# Altium PCB PCB2.PcbDoc
Units mm, origin at the board's own origin, x right, y up, seen from the top; angles counter-clockwise.
Board outline 50.04 x 50.04 mm, 2 copper layers (Top Layer, Bottom Layer); 19 components, 27 nets, 88 pads, 0 vias.
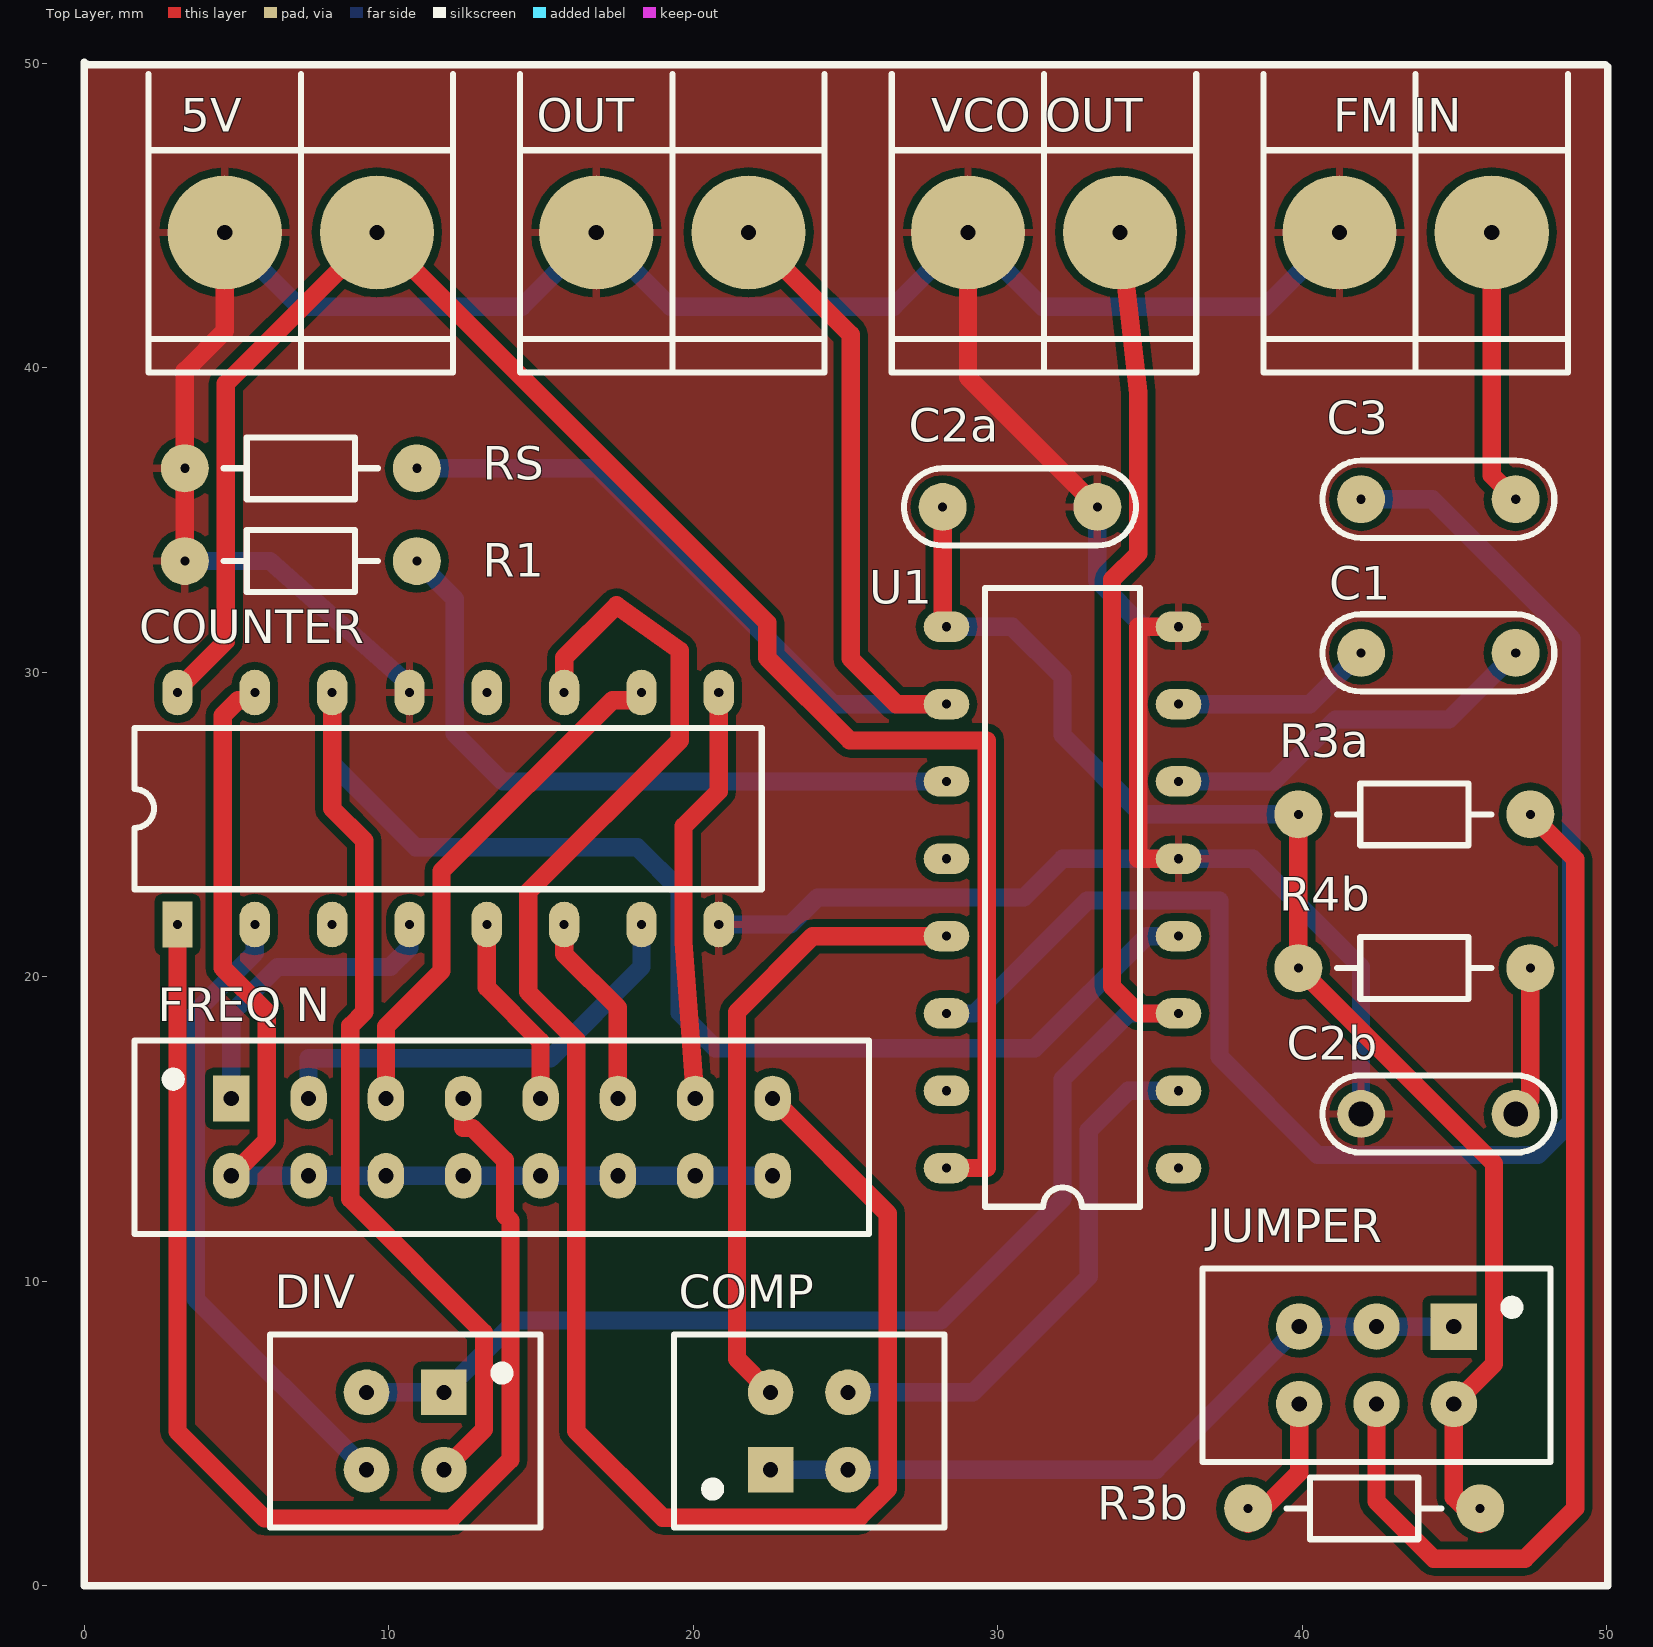
[diagram p0: Top Layer view]
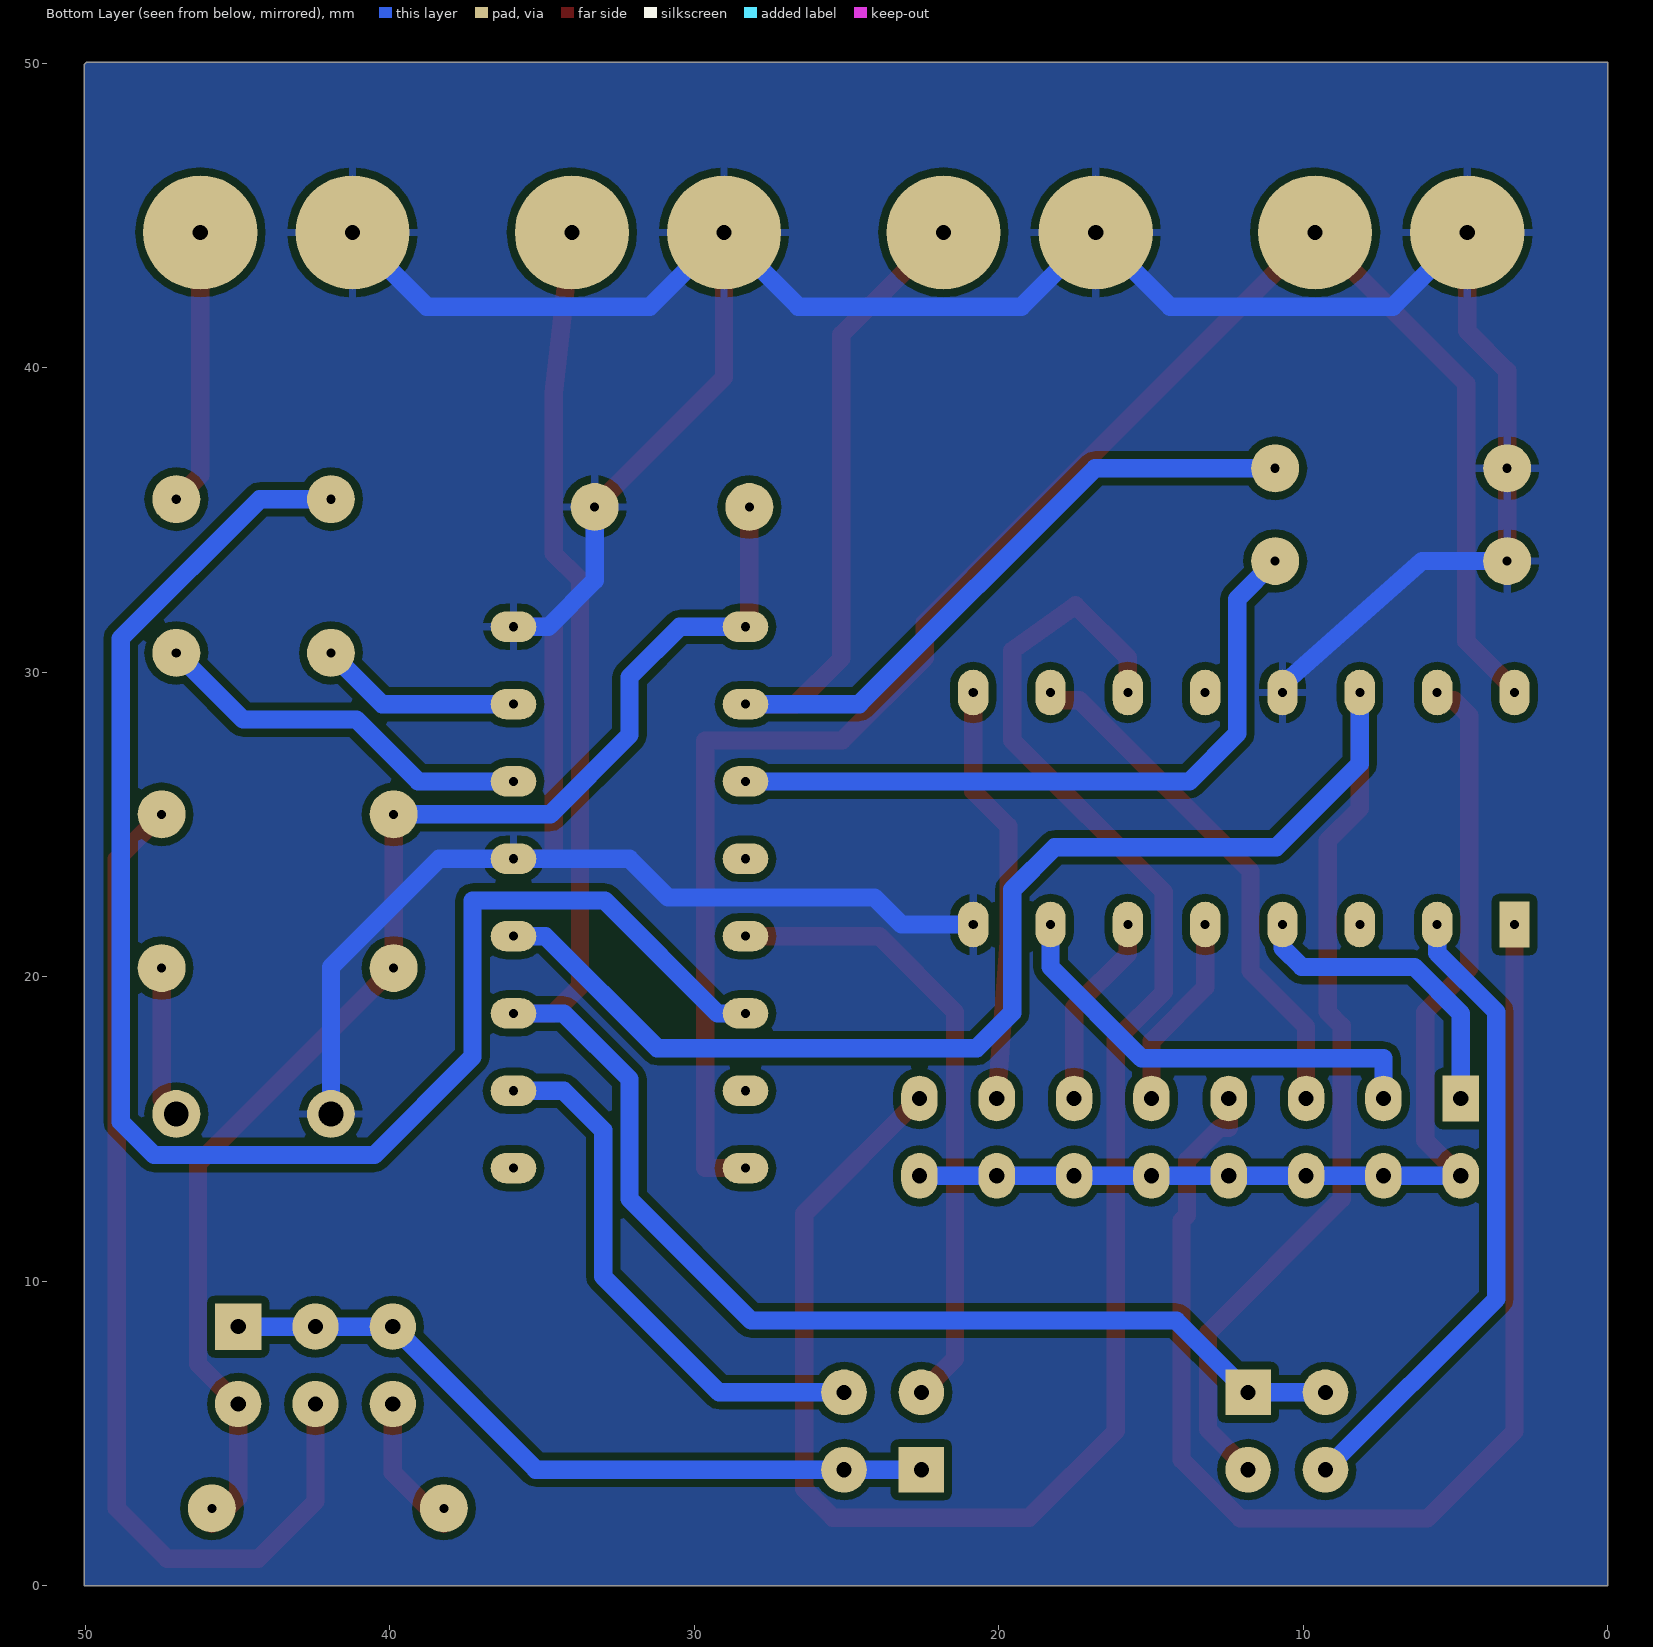
[diagram p1: Bottom Layer view, seen from below]

## Layer stack, top to bottom
Top Solder: solder mask 0.0102, Solder Resist, Dk 3.5
Top Layer: signal copper 0.0356
Dielectric 1: dielectric 0.32, FR-4, Dk 4.8
Bottom Layer: signal copper 0.0356
Bottom Solder: solder mask 0.0102, Solder Resist, Dk 3.5

## Board outline
0,0 50.038,0 50.038,49.962 49.962,50.038 0,50.038

## Design rules (kind name [scope] priority, off if disabled: settings)
Clearance [All] p1: gap=0.25 ignorepadtopadclearanceinfootprint=FALSE
PolygonConnect [All] p1: connectstyle=Relief reliefconductorwidth=0.254 reliefentries=4 polygonreliefangle="90 Angle" airgapwidth=0.254
RoutingVias [All] p1: holewidth=0.711 width=1.27 viastyle="Through Hole" minholewidth=0.711 minwidth=1.27 maxholewidth=0.711 maxwidth=1.27
SolderMaskExpansion [All] p1: expansion=0.102
Width [All] p1: maxlimit=0.6 minlimit=0.4 preferedwidth=0.6
30 further rules are at their usual default settings.

## Components (designator, comment, footprint, x,y, rotation, side; value= is the part's Value field where it differs from the comment)
5V "VCC" BORNERA2 7.112,44.45 r90 top
C1 "70pF" CAP200#1 44.477,30.639 r180 top
C2a "0.1uF" CAP200#1 30.734,35.433 r0 top
C2b "68pF" CAP200#2 44.477,15.494 r180 top
C3 "10nF" CAP200#1 44.477,35.687 r180 top
COMP "CON2*2" SIP2*2 22.543,3.81 r0 top
COUNTER "SN54HC4017J" J016 11.951,25.527 r0 top
DIV "CON2*2" SIP2*2 11.811,6.35 r180 top
"FM IN" "BORNERA 2" BORNERA2 43.728,44.45 r90 top
"FREQ N" "CON8*2" SIP8*2 4.826,16.002 r0 top
JUMPER "CON3*2" SIP3*2 44.985,8.509 r180 top
OUT "BORNERA 2" BORNERA2 19.317,44.45 r90 top
R1 "10k" RES300 3.302,33.655 r0 top
R3a "100k" RES300 47.498,25.336 r180 top
R3b "100k" RES300 38.227,2.54 r0 top
R4b "5k" RES300 47.498,20.288 r180 top
RS "100k" RES300 3.302,36.703 r0 top
U1 "CD4046B" DIP16 35.941,13.716 r180 top
"VCO OUT" "BORNERA 2" BORNERA2 31.523,44.45 r90 top

## Footprints (in the part's own frame and the unit in brackets; to place one, negate y for a bottom-side part, rotate by r counter-clockwise, add the part's x,y. Pads: shape width x height; smd on the part's side, far side on the other; paste and mask are expansions set on the pad)
BORNERA2 [mm] "Bornera con Tornillos 5mm separación"
  round 3.75 hole 0.5: 1(0,2.5) 2(0,-2.5)
  silkscreen extent -4.6,-5 5.2,5, body extent -3.76,-4.89 3.94,5.61, height 10
CAP200#1 [mil]
  round 62 hole 11.81: 1(-100,0) 2(100,0)
  silkscreen extent -150,-50 150,50, body extent -110,-46 110,44, height 246
CAP200#2 [mil]
  round 62 hole 32: 1(-100,0) 2(100,0)
  silkscreen extent -150,-50 150,50, body extent -110,-46 110,44, height 246
DIP16 [mm]
  oval 1.5x1 hole 0.3: 1(0,0) 2(0,-2.54) 3(0,-5.08) 4(0,-7.62) 5(0,-10.16) 6(0,-12.7) 7(0,-15.24) 8(0,-17.78) 9(7.62,-17.78) 10(7.62,-15.24) 11(7.62,-12.7) 12(7.62,-10.16) 13(7.62,-7.62) 14(7.62,-5.08) 15(7.62,-2.54) 16(7.62,0)
  silkscreen extent 1.27,-19.05 6.35,1.27, body extent -0.08,-18.89 7.79,1.11, height 1.98
J016 [mm] "DIP; 16 Leads; Row Spacing 7.62 mm; Pitch 2.54 mm"
  rect 1x1.5 hole 0.3: 1(-8.89,-3.81)
  oval 1x1.5 hole 0.3: 2(-6.35,-3.81) 3(-3.81,-3.81) 4(-1.27,-3.81) 5(1.27,-3.81) 6(3.81,-3.81) 7(6.35,-3.81) 8(8.89,-3.81) 9(8.89,3.81) 10(6.35,3.81) 11(3.81,3.81) 12(1.27,3.81) 13(-1.27,3.81) 14(-3.81,3.81) 15(-6.35,3.81) 16(-8.89,3.81)
  silkscreen extent -10.3,-2.65 10.3,2.65
RES300 [mil]
  round 62 hole 11.81: 1(0,0) 2(300,0)
  silkscreen extent 50,-40 250,40, body extent -10,-38 310,38, height 79
SIP2*2 [mm]
  rect 1.5x1.5 hole 0.5: 1(0,0)
  round 1.5 hole 0.5: 2(0,2.54) 3(2.54,0) 4(2.54,2.54)
  silkscreen extent -3.17,-1.91 5.71,4.44, body extent -1.27,-1.27 3.81,3.73, height 8.8
SIP3*2 [mil]
  rect 60x60 hole 19.68: 1(0,0)
  round 60 hole 19.68: 2(0,100) 3(100,0) 4(100,100) 5(200,0) 6(200,100)
  silkscreen extent -125,-75 325,175, body extent -50,-51 250,149, height 398
SIP8*2 [mm]
  rect 1.2x1.5 hole 0.5: 1(0,0)
  oval 1.2x1.5 hole 0.5: 2(0,-2.54) 3(2.54,0) 4(2.54,-2.54) 5(5.08,0) 6(5.08,-2.54) 7(7.62,0) 8(7.62,-2.54) 9(10.16,0) 10(10.16,-2.54) 11(12.7,0) 12(12.7,-2.54) 13(15.24,0) 14(15.24,-2.54) 15(17.78,0) 16(17.78,-2.54)
  silkscreen extent -3.17,-4.44 20.95,1.91, body extent -1.26,-3.78 19.06,1.3, height 1.5

## Part data
5V: library part "BORNERA 2"
C1 C2a C2b C3: library part CAP
COUNTER: "Decade Counter / Divider", ComponentLink1Description="Manufacturer Link", ComponentLink1URL=http://www.ti.com/, ComponentLink2Description=Datasheet, ComponentLink2URL=http://www-s.ti.com/sc/ds/sn74hc4017.pdf, DatasheetVersion=Jun-1989, LatestRevisionDate=04-Mar-2005, LatestRevisionNote="Stylized 3D Model Added.", PackageDescription="DIP; 16 Leads; Row Spacing 7.62 mm; Pitch 2.54 mm", PackageReference=J016, PackageVersion=Jun-1999, Published=8-Jun-2000, Publisher="Altium Limited"
R1 R3a R3b R4b RS: library part RES
U1: library part IC_DIP16

## Nets (pads, with @x,y where several pads share a name; then routed paths per layer and width w, separated by ;. In a path a pad name is that pad's centre, name@x,y a point inside that pad or via, vN(x,y) a via of type N, cw(c..) or ccw(c..) an arc to the next point about the centre after c; other vN are vias at no path point)
GND: 5V.1 "FM IN.1" "VCO OUT.1" C2a.2 C2b.2 COUNTER.8 COUNTER.13 OUT.1 R1.1 RS.1 U1.5 U1.8 | length 118.2
  Top Layer w0.6: R1.1 RS.1 3.302,39.903 4.612,41.213 5V.1 ; 29.023,44.45 29.023,39.684 C2a.2 ; U1.5 34.62,23.876 34.62,31.496 U1.8
  Bottom Layer w0.6: R1.1 6.096,33.655 10.681,29.591 COUNTER.13 ; 5V.1 7.05,42.012 14.379,42.012 OUT.1 19.256,42.012 26.584,42.012 29.023,44.45 31.461,42.012 38.79,42.012 41.228,44.45 ; COUNTER.8 23.19,21.717 24.079,22.606 30.861,22.606 32.131,23.876 U1.5 38.381,23.876 41.937,20.32 C2b.2 ; C2a.2 33.274,33.02 34.798,31.496 U1.8
NetC1_1: C1.1 U1.6 | length 12.8
  Bottom Layer w0.6: U1.6 39.065,26.416 41.097,28.448 44.826,28.448 C1.1
NetC1_2: C1.2 U1.7 | length 6.7
  Bottom Layer w0.6: U1.7 40.254,28.956 C1.2
NetC2a_1: C2a.1 JUMPER.2 R3a.2 R3b.2 R4b.2 U1.9 | length 46.2
  Top Layer w0.6: C2a.1 28.194,31.496 U1.9 ; R3a.2 R4b.2 46.304,13.862 46.304,7.288 JUMPER.2 44.985,2.894 R3b.2@45.847,2.032
  Bottom Layer w0.6: U1.9 30.48,31.496 32.131,29.845 32.131,27.94 34.734,25.336 R3a.2
NetC2b_1: C2b.1 R4b.1 | length 5
  Top Layer w0.6: C2b.1 47.498,15.975 R4b.1
NetC3_1: "FM IN.2" C3.1 | length 9.1
  Top Layer w0.6: 46.228,44.45 46.228,36.476 C3.1
NetC3_2: C3.2 U1.14 | length 53.7
  Bottom Layer w0.6: U1.14 29.235,18.796 32.944,22.504 37.287,22.504 37.287,17.374 40.513,14.148 47.752,14.148 48.844,15.24 48.844,31.115 44.272,35.687 C3.2
NetCOMP_1: COMP.1 COMP.3 JUMPER.1 JUMPER.3 JUMPER.5 | length 24.4
  Bottom Layer w0.6: COMP.1 COMP.3 35.206,3.81 JUMPER.5 JUMPER.3 JUMPER.1
NetCOMP_2: COMP.2 U1.13 | length 20.9
  Top Layer w0.6: COMP.2 21.438,7.455 21.438,18.847 23.927,21.336 U1.13
NetCOMP_4: COMP.4 U1.2 | length 17.8
  Bottom Layer w0.6: COMP.4 29.185,6.35 32.995,10.16 32.995,14.961 34.29,16.256 U1.2
NetCOUNTER_1: "FREQ N.7" COUNTER.1 | length 42.2
  Top Layer w0.6: COUNTER.1 3.061,5.067 5.918,2.21 12.065,2.21 13.995,4.14 13.995,11.989 13.818,12.167 13.818,13.97 12.751,15.037 12.446,15.037 12.446,16.002
NetCOUNTER_2: COUNTER.2 DIV.4 | length 21
  Bottom Layer w0.6: COUNTER.2 5.601,20.79 3.658,18.847 3.658,9.423 DIV.4
NetCOUNTER_4: "FREQ N.1" COUNTER.4 | length 10.3
  Bottom Layer w0.6: 4.826,16.002 4.826,18.796 6.35,20.32 10.046,20.32 10.681,20.955 COUNTER.4
NetCOUNTER_5: "FREQ N.9" COUNTER.5 | length 6.4
  Top Layer w0.6: COUNTER.5 13.221,19.647 14.986,17.882 14.986,16.002
NetCOUNTER_6: "FREQ N.11" COUNTER.6 | length 6.4
  Top Layer w0.6: COUNTER.6 15.761,20.752 17.526,18.987 17.526,16.002
NetCOUNTER_7: "FREQ N.3" COUNTER.7 | length 14.9
  Bottom Layer w0.6: 7.366,16.002 7.366,17.323 15.304,17.323 18.301,20.32 COUNTER.7
NetCOUNTER_9: "FREQ N.13" COUNTER.9 | length 13.8
  Top Layer w0.6: 20.066,16.002 19.685,21.133 19.685,24.943 20.841,26.099 COUNTER.9
NetCOUNTER_10: "FREQ N.5" COUNTER.10 | length 17.4
  Top Layer w0.6: 9.906,16.002 9.906,18.364 11.735,20.193 11.735,23.47 17.348,29.083 18.301,29.083 COUNTER.10
NetCOUNTER_11: "FREQ N.15" COUNTER.11 | length 60.7
  Top Layer w0.6: COUNTER.11 15.761,30.48 17.481,32.2 19.558,30.715 19.558,27.762 14.58,22.784 14.58,19.507 16.154,17.932 16.154,5.08 18.999,2.235 25.451,2.235 26.391,3.175 26.391,12.217 22.606,16.002
NetCOUNTER_14: COUNTER.14 DIV.2 U1.4 | length 66.4
  Top Layer w0.6: COUNTER.14 8.141,25.527 9.195,24.473 9.195,18.847 8.738,18.39 8.738,12.7 13.132,8.306 13.132,5.131 DIV.2
  Bottom Layer w0.6: COUNTER.14 8.141,27 10.884,24.257 18.161,24.257 19.558,22.86 19.558,18.821 20.726,17.653 31.217,17.653 34.9,21.336 U1.4
NetCOUNTER_15: "FREQ N.2" "FREQ N.4" "FREQ N.6" "FREQ N.8" "FREQ N.10" "FREQ N.12" "FREQ N.14" "FREQ N.16" COUNTER.15 | length 35.5
  Top Layer w0.6: 4.826,13.462 5.994,14.63 5.994,18.847 4.547,20.295 4.547,28.581 5.048,29.083 5.601,29.083 COUNTER.15
  Bottom Layer w0.6: 4.826,13.462 7.366,13.462 9.906,13.462 12.446,13.462 14.986,13.462 17.526,13.462 20.066,13.462 22.606,13.462
NetDIV_1: "VCO OUT.2" DIV.1 DIV.3 U1.3 | length 61.8
  Top Layer w0.6: 34.023,44.45 34.62,39.192 34.62,33.909 33.757,33.045 33.757,19.685 34.646,18.796 U1.3
  Bottom Layer w0.6: DIV.3 DIV.1 14.173,8.712 28.143,8.712 32.131,12.7 32.131,16.637 34.29,18.796 U1.3
NetJUMPER_4: JUMPER.4 R3a.1 | length 34.6
  Top Layer w0.6: JUMPER.4 42.445,2.767 44.323,0.889 47.32,0.889 48.971,2.54 48.971,23.863 R3a.1
NetJUMPER_6: JUMPER.6 R3b.1 | length 4.6
  Top Layer w0.6: R3b.1@38.227,2.032 39.905,3.71 JUMPER.6
NetOUT_2: OUT.2 RS.2 U1.10 | length 39.8
  Top Layer w0.6: OUT.2 25.171,41.096 25.171,30.455 26.67,28.956 U1.10
  Bottom Layer w0.6: RS.2 16.84,36.703 24.587,28.956 U1.10
NetR1_2: R1.2 U1.11 | length 23
  Bottom Layer w0.6: R1.2 12.167,32.41 12.167,27.991 13.741,26.416 U1.11
VCC: 5V.2 COUNTER.16 U1.16 | length 60.8
  Top Layer w0.6: COUNTER.16 3.061,29.439 4.648,31.026 4.648,39.486 5V.2 22.428,31.634 22.428,30.48 25.146,27.762 29.642,27.762 29.642,13.716 U1.16
pads on no net: COUNTER.3 COUNTER.12 U1.1 U1.12 U1.15

## Polygon pours and split planes (outlines as drawn)
GND on Bottom Layer "GND_L02_P000" (solid, remove dead copper, pour order 0): 0,0 0,50.038 49.962,50.038 50,50 50,0
GND on Top Layer "GND_L01_P002" (solid, remove dead copper, pour order 2): 0,0 50,0 50,50 50.038,50.038 0,50.038

## Silkscreen, mask and mechanical layers (free items; w line width, h text height)
Top Overlay:
  lines w0.254: 0,0 50.038,0 50.038,49.886 49.962,49.962 0,49.962 0.038,50 0,50.038 0,0